# Altium PCB VESC_POWER_74mm.PcbDoc
Units mil, origin at the board's own origin, x right, y up, seen from the top; angles counter-clockwise.
Board outline 2716.54 x 2125.98 mil, 2 copper layers (Top Layer, Bottom Layer), stack 62.209 mil thick; 53 components, 22 nets, 121 pads, 0 vias.
Unrouted connection lines stored in the file: 58.
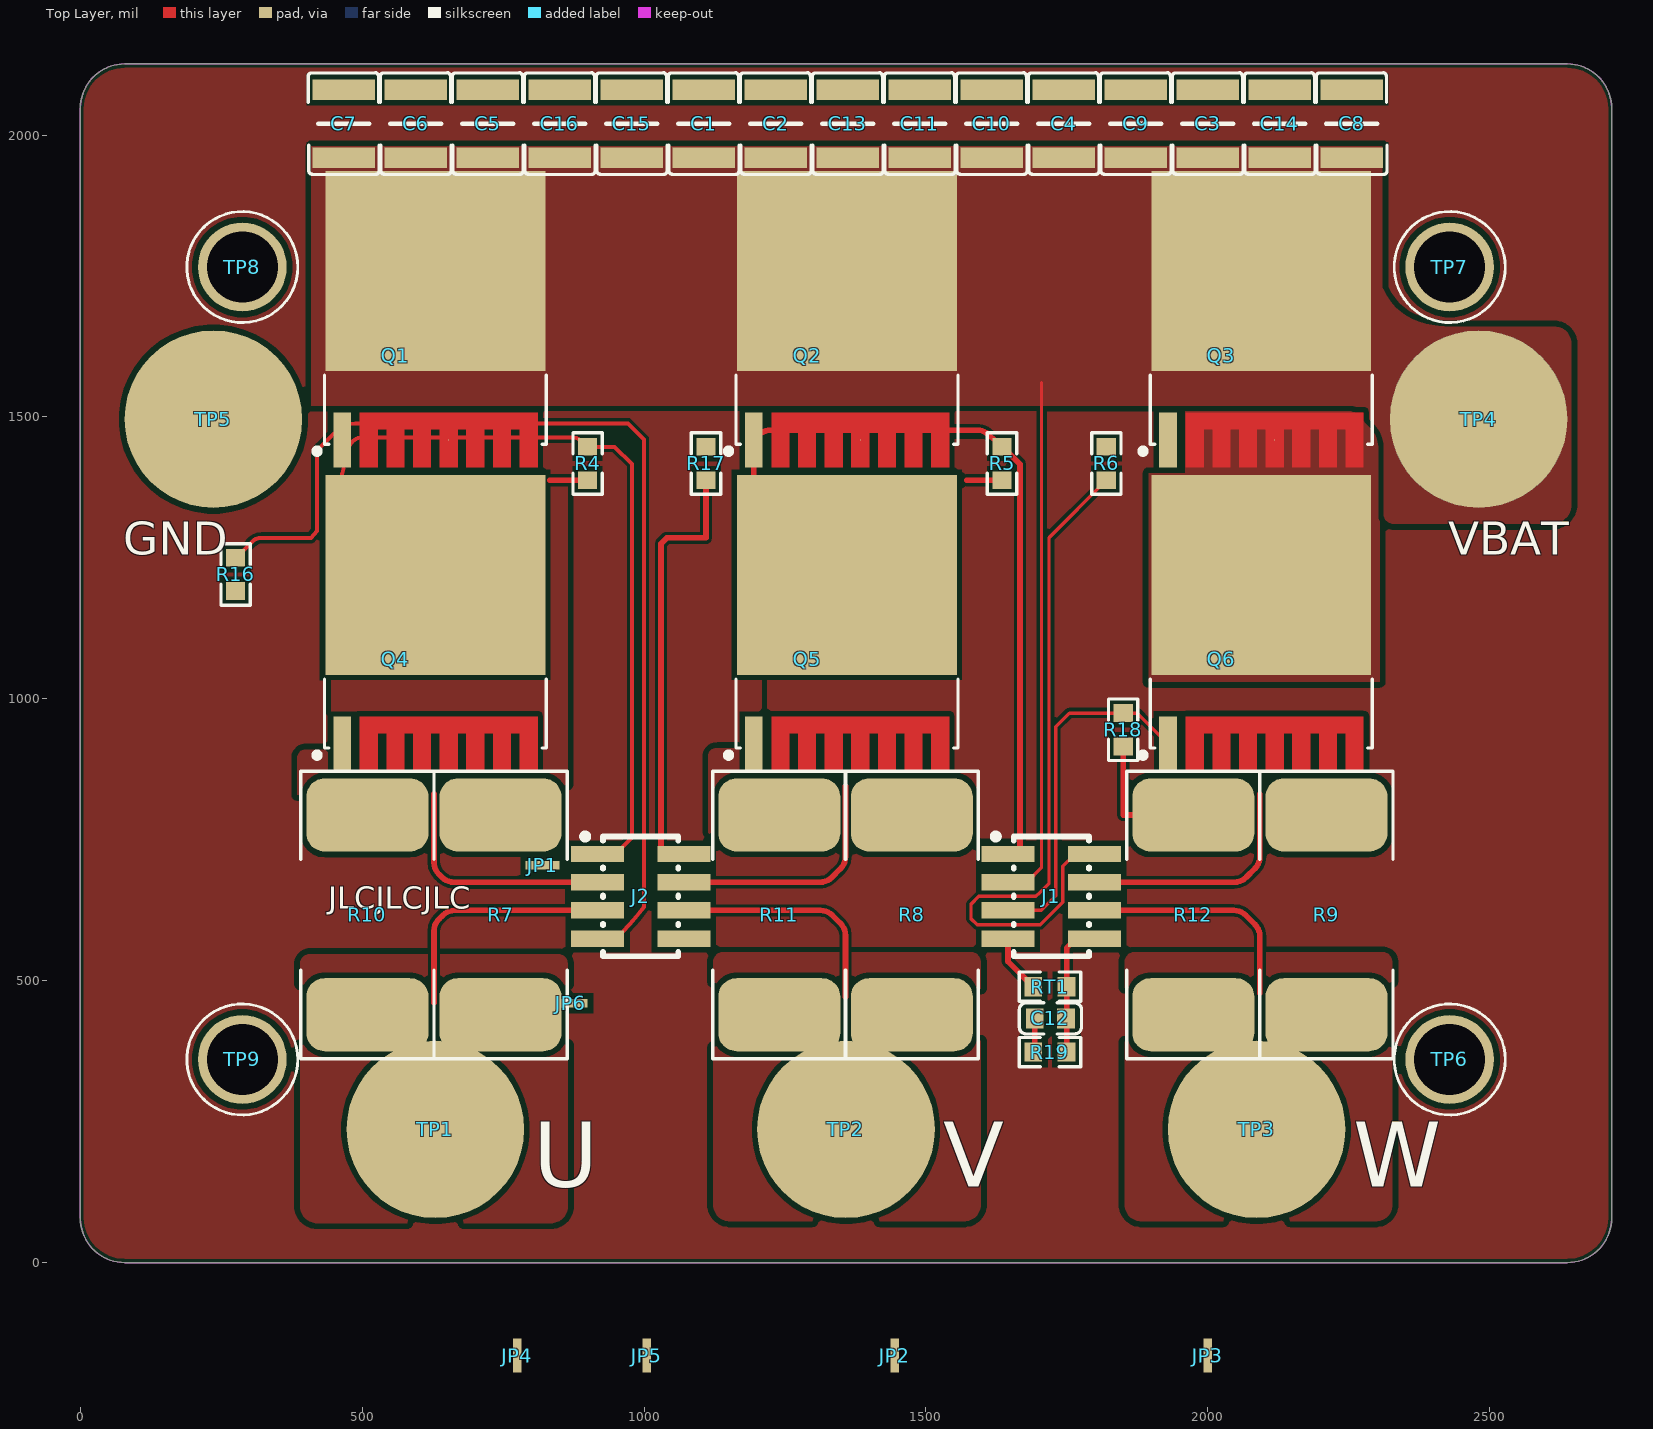
[diagram p0: Top Layer view]
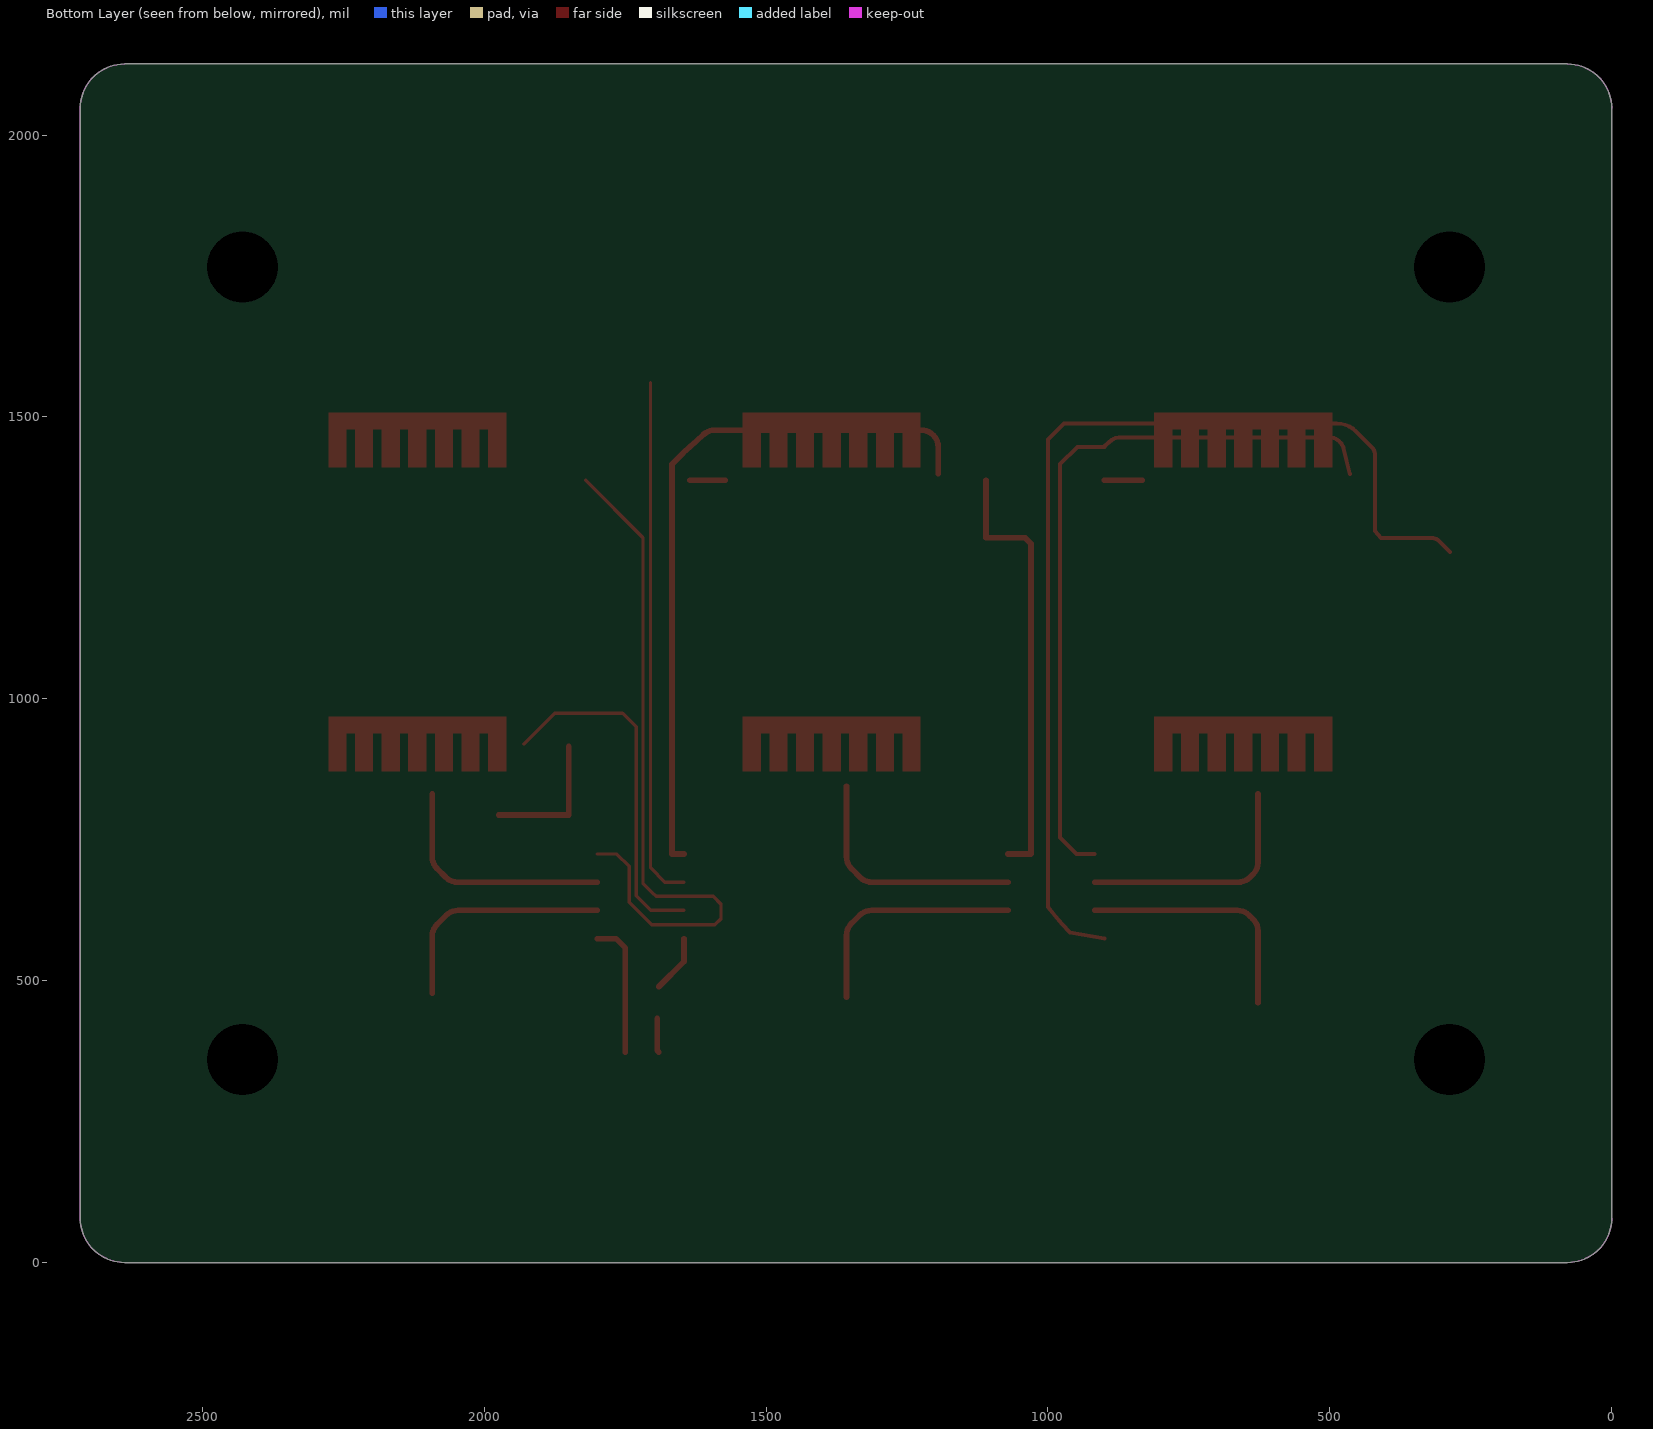
[diagram p1: Bottom Layer view, seen from below]
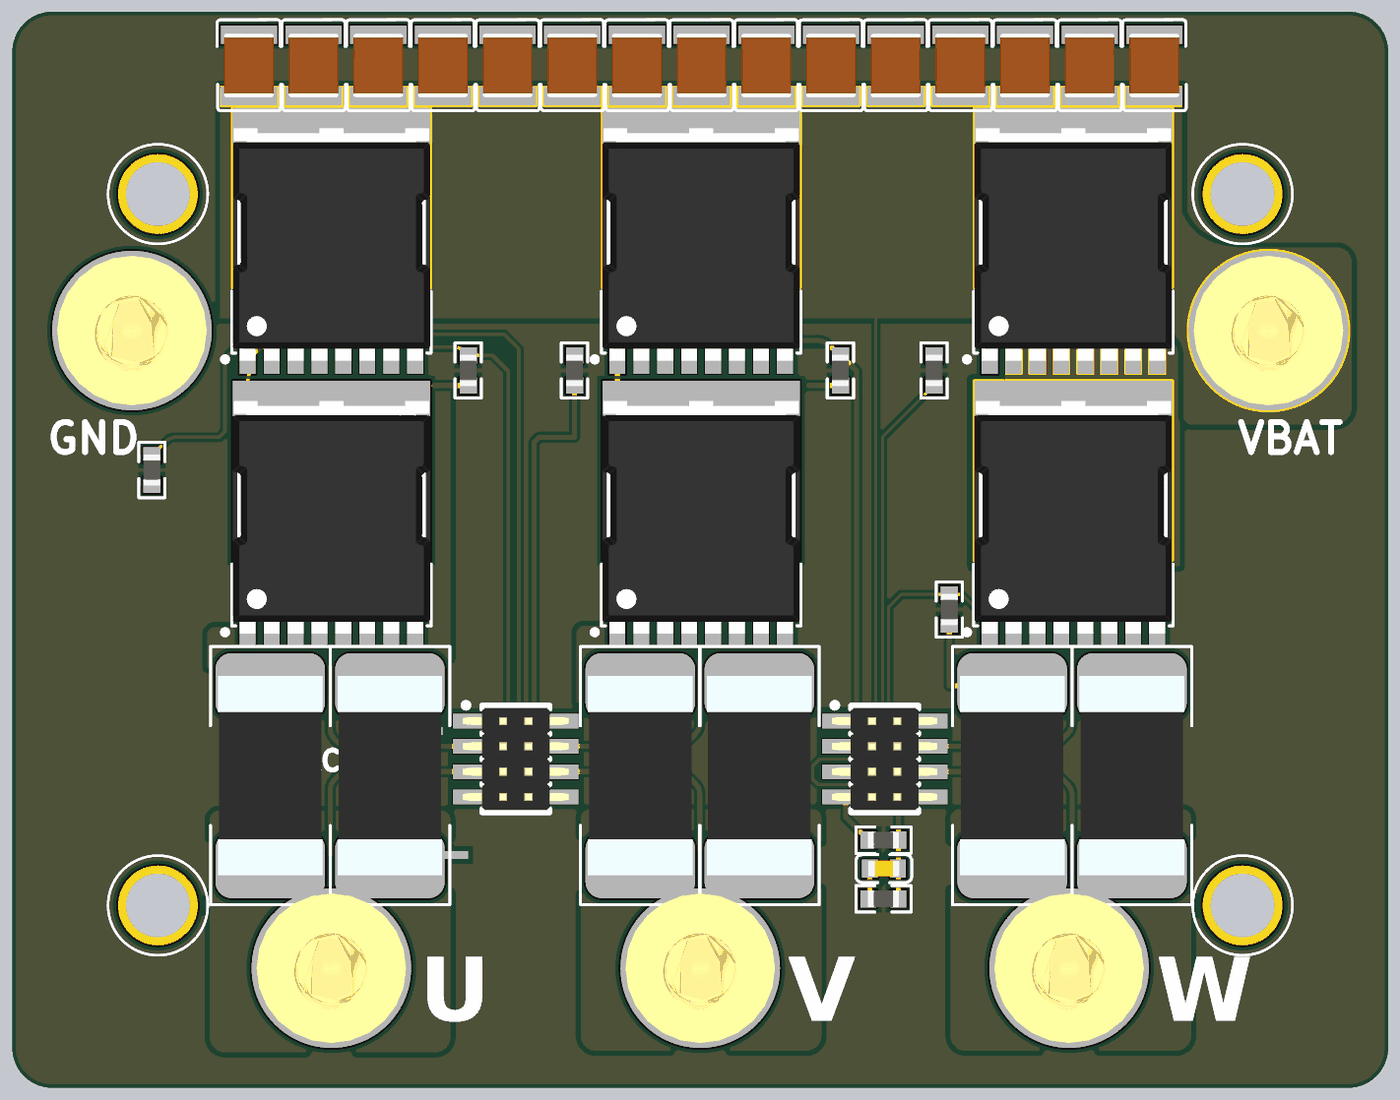
[diagram p2: 3D render of the assembled board from above, using the file's embedded part models]

## Layer stack, top to bottom
Top Solder: solder mask 0.4, Solder Resist, Dk 3.5
Top Layer: signal copper 1.4
Dielectric 1: dielectric 59.4094, FR-4, Dk 4.8
Bottom Layer: signal copper 1.4
Bottom Solder: solder mask 0.4, Solder Resist, Dk 3.5

## Board outline
0,78.74 ccw(c78.74,78.74) 78.74,0 2637.8,0 ccw(c2637.8,78.74) 2716.54,78.74 2716.54,2047.24 ccw(c2637.8,2047.24) 2637.8,2125.98 78.74,2125.98 ccw(c78.74,2047.24) 0,2047.24

## Design rules (kind name [scope] priority, off if disabled: settings)
Clearance [All] p1: gap=10 ignorepadtopadclearanceinfootprint=FALSE except(6: Arc-Arc Arc-Track Arc-SMDPad Arc-THPad Arc-Via Arc-Fill Arc-Poly Arc-Region Arc-Text Arc-Hole Track-Track Track-SMDPad Track-THPad Track-Via Track-Fill Track-Poly Track-Region Track-Text Track-Hole)
HoleSize [All] p1: absolutevalues=TRUE maxlimit=196.85 minlimit=1 maxpercent=80.000 minpercent=20.000
MinimumSolderMaskSliver [All] p1: minsoldermaskwidth=7.48
PolygonConnect [All] p1: connectstyle=Direct reliefconductorwidth=10 reliefentries=4 polygonreliefangle="90 Angle" airgapwidth=10
RoutingVias [All] p1: holewidth=28 width=50 viastyle="Through Hole" minholewidth=28 minwidth=50 maxholewidth=28 maxwidth=50
SilkToSilkClearance [All] p1: silktosilkclearance=0
SilkToSolderMaskClearance [IsPad] p1: minsilkscreentomaskgap=1 clearancetoexposedcopper=TRUE
SolderMaskExpansion [All] p1: expansion=4 istentingtop=FALSE
SupplyNets "Schematic Supply Nets_2" [InNet('GND')] p1: voltage=0.000
SupplyNets "Schematic Supply Nets_1" [InNet('3V3')] p2: voltage=0.000
SupplyNets "Schematic Supply Nets" [InNet('VIN')] p3: voltage=0.000
Width [All] p1: maxlimit=100 minlimit=6 preferedwidth=10
26 further rules are at their usual default settings.

## Components (designator, comment, footprint, x,y, rotation, side; value= is the part's Value field where it differs from the comment)
C1 "2.2uF/100V" CAPC3225X230N 1105.65,2020 r270 top
C2 "2.2uF/100V" CAPC3225X230N 1233.36,2020 r270 top
C3 "2.2uF/100V" CAPC3225X230N 1999.59,2020 r270 top
C4 "2.2uF/100V" CAPC3225X230N 1744.18,2020 r270 top
C5 "2.2uF/100V" CAPC3225X230N 722.54,2020 r270 top
C6 "2.2uF/100V" CAPC3225X230N 594.83,2020 r270 top
C7 "2.2uF/100V" CAPC3225X230N 467.13,2020 r270 top
C8 "2.2uF/100V" CAPC3225X230N 2255,2020 r270 top
C9 "2.2uF/100V" CAPC3225X230N 1871.88,2020 r270 top
C10 "2.2uF/100V" CAPC3225X230N 1616.47,2020 r270 top
C11 "2.2uF/100V" CAPC3225X230N 1488.77,2020 r270 top
C12 "2.2uF/6.3V" C0603 1720.79,432.97 r180 top
C13 "2.2uF/100V" CAPC3225X230N 1361.06,2020 r270 top
C14 "2.2uF/100V" CAPC3225X230N 2127.29,2020 r270 top
C15 "2.2uF/100V" CAPC3225X230N 977.95,2020 r270 top
C16 "2.2uF/100V" CAPC3225X230N 850.24,2020 r270 top
J1 "X6521WVS-2x04H-C60D74" HDR-SMD_8P-P1.27-V-M-C2-C4-LS5.3 1722.44,649.61 r270 top
J2 "X6521WVS-2x04H-C60D74" HDR-SMD_8P-P1.27-V-M-C2-C4-LS5.3 994.09,649.61 r270 top
JP1 "Short" SHORT 820,705 r0 top
JP2 "Short" SHORT 1445,-165 r90 top
JP3 "Short" SHORT 2000,-164.9 r90 top
JP4 "Short" SHORT 775,-165 r90 top
JP5 "Short" SHORT 1005,-165 r90 top
JP6 "Short" SHORT 870,460 r0 top
Q1 "NCEP023N10LL" TOLL 630,1674.17 r90 top
Q2 "NCEP023N10LL" TOLL 1360,1674.17 r90 top
Q3 "NCEP023N10LL" TOLL 2095,1674.17 r90 top
Q4 "NCEP023N10LL" TOLL 630,1135 r90 top
Q5 "NCEP023N10LL" TOLL 1360,1135 r90 top
Q6 "NCEP023N10LL" TOLL 2095,1135 r90 top
R4 "5.1K/1%" R0603 900,1417.32 r90 top
R5 "5.1K/1%" R0603 1635,1417.32 r90 top
R6 "5.1K/1%" R0603 1820,1417.32 r270 top
R7 "1mR/1%" R3920 745.51,616.73 r270 top
R8 "1mR/1%" R3920 1475,616.73 r270 top
R9 "1mR/1%" R3920 2210.51,616.73 r270 top
R10 "1mR/1%" R3920 509.29,616.73 r270 top
R11 "1mR/1%" R3920 1240,616.73 r270 top
R12 "1mR/1%" R3920 1974.29,616.73 r270 top
R16 "5.1K/1%" R0603 275.59,1220.47 r90 top
R17 "5.1K/1%" R0603 1110,1417.32 r270 top
R18 "5.1K/1%" R0603 1850,945 r90 top
R19 "10K/1%" R0603 1720,373.31 r0 top
RT1 "NTC" R0603 1720,489.25 r0 top
TP1 "PHA" TP_8X8 629.92,236.22 r0 top
TP2 "PHB" TP_8X8 1358.27,236.22 r0 top
TP3 "PHC" TP_8X8 2086.61,236.22 r0 top
TP4 "GND" TP_8X8 2480.31,1496.06 r0 top locked
TP5 "VIN" TP_8X8 236.22,1496.06 r0 top
TP6 "TEST POINT" HOLE-3.2MM_M 2429.13,360.24 r0 top
TP7 "TEST POINT" HOLE-3.2MM_M 2429.13,1765.75 r0 top
TP8 "TEST POINT" HOLE-3.2MM_M 287.4,1765.75 r0 top
TP9 "TEST POINT" HOLE-3.2MM_M 287.4,360.24 r0 top

## Footprints (in the part's own frame and the unit in brackets; to place one, negate y for a bottom-side part, rotate by r counter-clockwise, add the part's x,y. Pads: shape width x height; smd on the part's side, far side on the other; paste and mask are expansions set on the pad)
C0603 [mm] "C0603"
  rect 0.8x0.9 smd: 1(-0.7,0) 2(0.7,0)
  silkscreen extent -1.41,-0.7 1.4,0.7, body extent -0.8,-0.41 0.8,0.41, height 0.9
CAPC3225X230N [mm]
  rect 0.92x2.82 smd: 1(-1.54,0) 2(1.54,0)
  silkscreen extent -2.3,-1.6 2.28,1.6, body extent -1.6,-1.25 1.6,1.25, height 2.47
HDR-SMD_8P-P1.27-V-M-C2-C4-LS5.3 [mm]
  rect 0.74x2.4 smd paste+0 mask+0.05: 1(-1.905,-1.95) 2(-1.905,1.95) 3(-0.635,-1.95) 4(-0.635,1.95) 5(0.635,-1.95) 6(0.635,1.95) 7(1.905,-1.95) 8(1.905,1.95)
  silkscreen extent -2.84,-2.64 2.69,1.7, body extent -2.54,-2.65 2.54,2.65, height 5.5
HOLE-3.2MM_M [mm]
  round 4 / inner round 4 / far side round 0 hole 3.2: 1(0,0)
  silkscreen extent -2.5,-2.5 2.5,2.5
R0603 [mil] "R0603"
  rect 31.73x34.02 smd: 1(-29.65,0) 2(29.65,0)
  silkscreen extent -55,-26 55,26, body extent -31,-17 31,17, height 20
R3920 [mm] "R3920"
  rrect50% 3.3x5.5 smd: 1(-4.5,0) 2(4.5,0)
  silkscreen extent -6.48,-3 6.48,3, body extent -5,-2.63 5,2.63, height 1.37
SHORT [mil] "SHORT"
  rect 30x15 smd mask+0: 1(-14.9,0)
  rect 30x15 smd paste+0 mask+0: 2(14.9,0)
TOLL [mm] "TOLL"
  rect 2.463x0.8 smd: 1(-5.469,4.2)
  rect 9x9.9 smd: 2(2.15,0)
  oct 0.025x0.025 smd: 3(-5.46,-0.6)
  round 0.025 smd: 3(-5.46,-0.6)
  Top Layer region: -6.691,3.4 -4.228,3.4 -4.228,-4.6 -6.691,-4.6 -6.691,-3.8 -4.991,-3.8 -4.991,-3.4 -6.691,-3.4 -6.691,-2.6 -4.991,-2.6 -4.991,-2.2 -6.691,-2.2 -6.691,-1.4 -4.991,-1.4 -4.991,-1 -6.691,-1 -6.691,-0.2 -4.991,-0.2 -4.991,0.2 -6.691,0.2 -6.691,1 -4.991,1 -4.991,1.4 -6.691,1.4 -6.691,2.2 -4.991,2.2 -4.991,2.6 -6.691,2.6
  silkscreen extent -6.1,-5 -2.55,5.46, body extent -6.04,-4.95 5.63,4.95, height 2.3
TP_8X8 [mm] "TP_8X8"
  round 8 smd: 1(0,0)
  body extent -3.75,-3.75 3.74,3.75, height 23

## Part data
C1 C2 C3 C4 C5 C6 C7 C8 C9 C10 C11 C12 C13 C14 C15 C16: library part "CAP NP"
  C1 C2 C3 C4 C5 C6 C7 C8 C9 C10 C11 C13 C14 C15 C16: PCB Footprint=C1206
  C12: PCB Footprint=C0603
J1 J2: Color=黑色, Current Rating (Max)=3A, JLCPCB Part Class="Extended Part", LCSC Part Name="2x4P 间距:2.54mm 方针", Manufacturer="XKB Connection(中国星坤)", Operating Temperature Range=-40℃~+105℃, Soldering Temperature(Max)=260℃, Voltage Rating (Max)=250V, Add into BOM=yes, Circluar Pins/Square Pins=方针, Contact Material=黄铜, Contact Plating=金, Convert to PCB=yes, Datasheet=https://atta.szlcsc.com/upload/public/pdf/source/20211009/E3239EE5247E6BAFECB8B74A4FCF9AB8.pdf, Device=X6521WVS-2x04H-C60D74, Insulation Height=2.5mm, Length of End Connection Pin=-, Length of Mating Pin=-, Manufacturer Part=X6521WVS-2x04H-C60D74, Mounting Type=-, Number of Pins=8P, Number of Rows=双排, Pin Structure=2x4P, Pitch=2.54mm, Row Spacing=2.54mm, Supplier=LCSC, Supplier Footprint=SMD,P=2.54mm, Supplier Part=C780053, Symbol=X6521WVS-2*04H-C60D74
JP1 JP2 JP3 JP4 JP5 JP6: library part SHORT, "2 PIN SHORTED TO CONNECT DIFFERENT NETS", CLASS=DISCRETE, PART_NUMBER=TMP-442
Q1 Q2 Q3 Q4 Q5 Q6: library part "MOSFET N", PCB Footprint=TOLL
R4 R5 R6 R7 R8 R9 R10 R11 R12 R16 R17 R18 R19: library part RESISTOR
  R4 R5 R6 R16 R17 R18 R19: PCB Footprint=R0603
  R7 R8 R9 R10 R11 R12: PCB Footprint=R3920
TP1 TP2 TP3 TP4 TP5: library part "TEST POINT", PCB Footprint=TP_8x8
RT1: PCB Footprint=R0603

## Nets (pads, with @x,y where several pads share a name; then routed paths per layer and width w, separated by ;. In a path a pad name is that pad's centre, name@x,y a point inside that pad or via, vN(x,y) a via of type N, cw(c..) or ccw(c..) an arc to the next point about the centre after c; other vN are vias at no path point)
3V3: J1.7 RT1.1 | length 103.9
  Top Layer w10: J1.7 1645.67,533.94 RT1.1
ADC_TEMP: C12.1 J1.8 R19.2 RT1.2 | length 241
  Top Layer w10: R19.2 RT1.2 1749.65,557.72 1766.53,574.61 J1.8
GHA: J2.1 Q1.1 R4.2 | length 1313.8
  Top Layer w7.01: 464.65,1398.86 475.8,1443.84 476.04,1444.83 cw(c496.45,1439.78) 481.55,1454.61 484.06,1457.12 cw(c498.92,1442.25) 498.92,1463.27 873.85,1463.27 cw(c873.85,1442.25) 883.7,1460.82 886.5,1459.33 R4.2@901.14,1446.97 ; R4.2 947.99,1446.97 978.84,1416.12 978.84,753.84 949.61,724.61 J2.1
GHB: J1.1 Q2.1 R5.2 | length 1272.7
  Top Layer w10: 1194.65,1398.86 1194.65,1446.47 cw(c1224.65,1446.47) 1224.65,1476.47 1590.84,1476.47 cw(c1590.84,1446.47) 1610.97,1468.72 1622.99,1457.83 R5.2 1647.01,1436.1 1667.01,1416.1 1667.01,1365.6 1667.01,724.61 J1.1
GHC: J1.2 Q3.1 R6.2 | length 1249.4
  Top Layer w6: J1.2 1764.61,724.61 1742.97,702.97 1742.97,639.23 1702.91,599.17 1590.83,599.17 1580,610 1580,635.61 1593.82,649.43 1695.03,649.43 1701.91,656.31 1718.39,672.79 1718.39,955.36 1718.39,1286.07 R6.2
GLA: J2.7 Q4.1 R16.2 | length 1851
  Top Layer w7: R16.2@286.61,1260 305.85,1279.24 cw(c320.67,1264.35) 320.67,1285.35 409.09,1285.35 419.84,1297.6 419.84,1431.88 cw(c440.84,1431.88) 425.95,1446.69 453.53,1474.26 cw(c487.79,1439.83) 487.79,1488.41 971.59,1488.41 1000,1460 1000,630.68 cw(c634.92,907.12) 961.07,585.67 J2.7@900,575
GLB: J2.2 Q5.1 R17.2 | length 777.6
  Top Layer w10: J2.2 1030.39,724.61 1030,725 1030,1275 1040.35,1285.35 1110.04,1285.35 ; 1110,1285.39 R17.2
GLC: J1.5 Q6.1 R18.2 | length 627.5
  Top Layer w6: J1.5 1679.61,624.61 1704.61,624.61 1730.39,650.39 1730.39,950.39 1754.65,974.65 R18.2 1874.68,974.65 Q6.1
GND: C1.1 C2.1 C3.1 C4.1 C5.1 C6.1 C7.1 C8.1 C9.1 C10.1 C11.1 C12.2 C13.1 C14.1 C15.1 C16.1 J2.8 JP4.2 JP5.2 JP6.2 R19.1 TP5.1 TP6.1 TP7.1 TP9.1 | length 60.9
  Top Layer w10: R19.1 1693.23,376.18 C12.2
NetJP1_1: JP1.1 Q4.3 R7.1 R10.1 R16.1
NetJP2_1: JP2.1 Q5.3 R8.1 R11.1 R17.1
NetJP3_1: JP3.1 Q6.3 R9.1 R12.1 R18.1 | length 245.7
  Top Layer w10: R18.1 1850,793.9 1971.46,793.9 R12.1
NetQ1_3: Q1.3 Q4.2 R4.1 TP1.1 | length 67.3
  Top Layer w10: 832.68,1387.68 R4.1
NetQ2_3: Q2.3 Q5.2 R5.1 TP2.1 | length 62.7
  Top Layer w10: 1572.32,1387.68 R5.1
NetQ3_3: Q3.3 Q6.2 R6.1 TP3.1
PHA: J2.5 JP6.1 R7.2 R10.2 | length 437.1
  Top Layer w10: 627.5,460.58 627.5,588.01 cw(c657.5,588.01) 636.27,609.21 642.89,615.83 cw(c664.1,594.61) 664.1,624.61 J2.5
PHB: J2.6 JP4.1 R8.2 R11.2 | length 418.9
  Top Layer w10: J2.6 1312.97,624.61 cw(c1312.97,594.61) 1334.17,615.83 1348.66,601.34 cw(c1327.44,580.14) 1357.44,580.14 1357.44,470.9
PHC: J1.6 JP5.1 R9.2 R12.2 | length 417.9
  Top Layer w10: J1.6 2046.3,624.61 cw(c2046.3,594.61) 2067.5,615.83 2083.63,599.7 cw(c2062.4,578.5) 2092.4,578.5 2092.4,477.62
SHA: J2.3 JP1.2 | length 430.3
  Top Layer w10: 627.5,831.08 627.5,709.93 ccw(c657.5,709.93) 636.27,688.73 641.62,683.38 ccw(c662.82,704.61) 662.82,674.61 J2.3
SHB: J2.4 JP2.2 | length 435.2
  Top Layer w10: J2.4 1312.18,674.61 ccw(c1312.18,704.61) 1333.38,683.38 1348.71,698.71 ccw(c1327.49,719.91) 1357.49,719.91 1357.49,845
SHC: J1.4 JP3.2 | length 427.8
  Top Layer w10: J1.4 2047.12,674.61 ccw(c2047.12,704.61) 2068.32,683.38 2083.63,698.69 ccw(c2062.4,719.89) 2092.4,719.89 2092.4,831.04
VIN: C1.2 C2.2 C3.2 C4.2 C5.2 C6.2 C7.2 C8.2 C9.2 C10.2 C11.2 C13.2 C14.2 C15.2 C16.2 J1.3 Q1.2 Q2.2 Q3.2 TP4.1 TP8.1 | length 930.7
  Top Layer w6: J1.3 1679.61,674.61 1705,700 1705,1560.81

## Polygon pours and split planes (outlines as drawn)
VIN on Top Layer "VIN_L01_P000" (solid, pour order 0): 410.18,1520 410.18,1980 2309.82,1980 2309.82,1520
no net on Top Layer "NONET_L01_P008" (solid, pour order 8): 0,78.74 ccw(c78.74,78.74) 78.74,0 2637.8,0 ccw(c2637.8,78.74) 2716.54,78.74 2716.54,2047.24 ccw(c2637.8,2047.24) 2637.8,2125.98 78.74,2125.98 ccw(c78.74,2047.24) 0,2047.24
no net on Top Layer "NONET_L01_P003" (solid, pour order 3): 1228.46,1460 1646.7,1460 cw(c1646.7,1434.2) 1672.5,1434.2 1672.5,777.5 cw(c1647.66,777.5) 1647.66,752.66 1123.88,752.66 cw(c1123.88,762.66) 1113.88,762.66 1113.88,897.89 cw(c1128.64,897.89) 1128.64,912.66 1208.88,912.66 ccw(c1208.88,922.66) 1218.88,922.66 1218.88,1450.41 cw(c1228.46,1450.41)
NetQ3_3 on Top Layer "NETQ3_3_L01_P007" (solid, pour order 7): 2305,1520.25 2305,1030 1894.94,1030 1894.94,1400 1960,1400 1960,1520.25
no net on Top Layer "NONET_L01_P006" (solid, pour order 6): 1869.43,550 2310.57,550 cw(c2310.57,533.07) 2327.5,533.07 2327.5,103.07 cw(c2297.5,103.07) 2297.5,73.07 1882.5,73.07 cw(c1882.5,103.07) 1852.5,103.07 1852.5,533.07 cw(c1869.43,533.07)
no net on Top Layer "NONET_L01_P005" (solid, pour order 5): 1139.43,550 1580.57,550 cw(c1580.57,533.07) 1597.5,533.07 1597.5,103.07 cw(c1567.5,103.07) 1567.5,73.07 1152.5,73.07 cw(c1152.5,103.07) 1122.5,103.07 1122.5,533.07 cw(c1139.43,533.07)
no net on Top Layer "NONET_L01_P004" (solid, pour order 4): 406.93,546.93 848.07,546.93 cw(c848.07,530) 865,530 865,100 cw(c835,100) 835,70 420,70 cw(c420,100) 390,100 390,530 cw(c406.93,530)
no net on Top Layer "NONET_L01_P002" (solid, pour order 2): 445,1457.34 852.66,1457.34 cw(c852.66,1445) 865,1445 865,760.39 cw(c854.61,760.39) 854.61,750 395,750 cw(c395,760) 385,760 385,895.24 cw(c399.76,895.24) 399.76,910 435,910 ccw(c435,920) 445,920
VIN on Top Layer "VIN_L01_P001" (solid, pour order 1): 2645,1345 2645,1630 ccw(c2614.75,1630) 2614.75,1660.25 2424.75,1660.25 cw(c2438.35,1893.92) 2381.38,1666.9 cw(c2406.82,1768.28) 2308.84,1731.87 cw(c2548.17,1820.81) 2293.32,1805.25 2185.25,1805.25 2180.25,1800.25 2180.25,1540.25 2191.72,1528.79 ccw(c2212.32,1549.39) 2212.32,1520.25 2252.32,1520.25 cw(c2252.33,1497.21) 2268.64,1513.49 2296.42,1485.71 cw(c2258.34,1447.63) 2312.2,1447.63 2312.2,1327.8 ccw(c2329.75,1327.8) 2329.75,1310.25 2610.25,1310.25 ccw(c2610.25,1345)

## Keep-outs
Keep-Out Layer:
  the board outline again, w1

## Silkscreen, mask and mechanical layers (free items; w line width, h text height)
Top Overlay:
  text "GND" at 76.29,1255.48 h59.06
  text "VBAT" at 2426.77,1255.48 h59.06
  text "JLCJLCJLC" at 440,627.5 h39.37
  text "U" at 803.12,96.14 h196.85
  text "V" at 1530.98,96.14 h196.85
  text "W" at 2258.02,96.14 h196.85
Mechanical 1:
  circle w5: c2429.13,1765.75 r59.06
  circle w5: c2429.13,360.24 r59.06
  circle w5: c287.4,360.24 r59.06
  circle w5: c287.4,1765.75 r59.06
  lines w5: 2637.8,2123.78 cw(c2637.8,2045.04) 2716.54,2045.04 2716.54,76.54 ; 2637.8,2125.98 78.74,2125.98 ccw(c78.74,2047.24) 0,2047.24 0,78.74 ccw(c78.74,78.74) 78.74,0 2637.8,0 ccw(c2637.8,78.74) 2716.54,78.74
Mechanical 6:
  lines w1: -25,0 25,0 ; 0,-25 0,25

## Text inside footprints (layer, text, board x,y; h text height)
C12: Mechanical 8 "2" at 1703.23,432.97 h25 r180; Mechanical 8 "1" at 1758.35,432.97 h25 r180
Q1: Mechanical 8 "2" at 660,1758.82 h25 r180; Mechanical 8 "3" at 645.43,1439.92 h25 r90; Mechanical 8 "1" at 456.46,1443.86 h25 r90
Q2: Mechanical 8 "1" at 1186.46,1443.86 h25 r90; Mechanical 8 "3" at 1375.43,1439.92 h25 r90; Mechanical 8 "2" at 1390,1758.82 h25 r180
Q3: Mechanical 8 "2" at 2125,1758.82 h25 r180; Mechanical 8 "3" at 2110.43,1439.92 h25 r90; Mechanical 8 "1" at 1921.46,1443.86 h25 r90
Q4: Mechanical 8 "1" at 456.46,904.68 h25 r90; Mechanical 8 "3" at 645.43,900.75 h25 r90; Mechanical 8 "2" at 660,1219.65 h25 r180
Q5: Mechanical 8 "2" at 1390,1219.65 h25 r180; Mechanical 8 "3" at 1375.43,900.75 h25 r90; Mechanical 8 "1" at 1186.46,904.68 h25 r90
Q6: Mechanical 8 "1" at 1921.46,904.68 h25 r90; Mechanical 8 "3" at 2110.43,900.75 h25 r90; Mechanical 8 "2" at 2125,1219.65 h25 r180
R4: Mechanical 8 "2" at 907.87,1476.69 h25 r90; Mechanical 8 "1" at 907.87,1413.7 h25 r90
R5: Mechanical 8 "1" at 1642.87,1413.7 h25 r90; Mechanical 8 "2" at 1642.87,1476.69 h25 r90
R6: Mechanical 8 "1" at 1812.13,1420.94 h25 r270; Mechanical 8 "2" at 1812.13,1357.95 h25 r270
R7: Mechanical 8 "2" at 761.57,431.69 h25 r270; Mechanical 8 "1" at 761.57,786.02 h25 r270
R8: Mechanical 8 "1" at 1491.06,786.02 h25 r270; Mechanical 8 "2" at 1491.06,431.69 h25 r270
R9: Mechanical 8 "1" at 2226.57,786.02 h25 r270; Mechanical 8 "2" at 2226.57,431.69 h25 r270
R10: Mechanical 8 "1" at 525.35,786.02 h25 r270; Mechanical 8 "2" at 525.35,431.69 h25 r270
R11: Mechanical 8 "2" at 1256.06,431.69 h25 r270; Mechanical 8 "1" at 1256.06,786.02 h25 r270
R12: Mechanical 8 "2" at 1990.35,431.69 h25 r270; Mechanical 8 "1" at 1990.35,786.02 h25 r270
R16: Mechanical 8 "1" at 283.46,1216.85 h25 r90; Mechanical 8 "2" at 283.46,1279.84 h25 r90
R17: Mechanical 8 "1" at 1102.13,1420.95 h25 r270; Mechanical 8 "2" at 1102.13,1357.95 h25 r270
R18: Mechanical 8 "1" at 1857.87,941.38 h25 r90; Mechanical 8 "2" at 1857.87,1004.37 h25 r90
R19: Mechanical 8 "2" at 1779.37,365.43 h25; Mechanical 8 "1" at 1716.38,365.43 h25
RT1: Mechanical 8 "2" at 1779.37,481.38 h25; Mechanical 8 "1" at 1716.38,481.38 h25
TP1: Mechanical 8 "1" at 559.92,236.22 h25
TP2: Mechanical 8 "1" at 1288.27,236.22 h25
TP3: Mechanical 8 "1" at 2016.61,236.22 h25
TP4: Mechanical 8 "1" at 2410.31,1496.06 h25
TP5: Mechanical 8 "1" at 166.22,1496.06 h25